# Altium PCB NMP_PCB.PcbDoc
Units mil, origin at the board's own origin, x right, y up, seen from the top; angles counter-clockwise.
Board outline 1600 x 920 mil, 2 copper layers (Top Layer, Bottom Layer); 9 components, 11 nets, 32 pads, 2 vias.
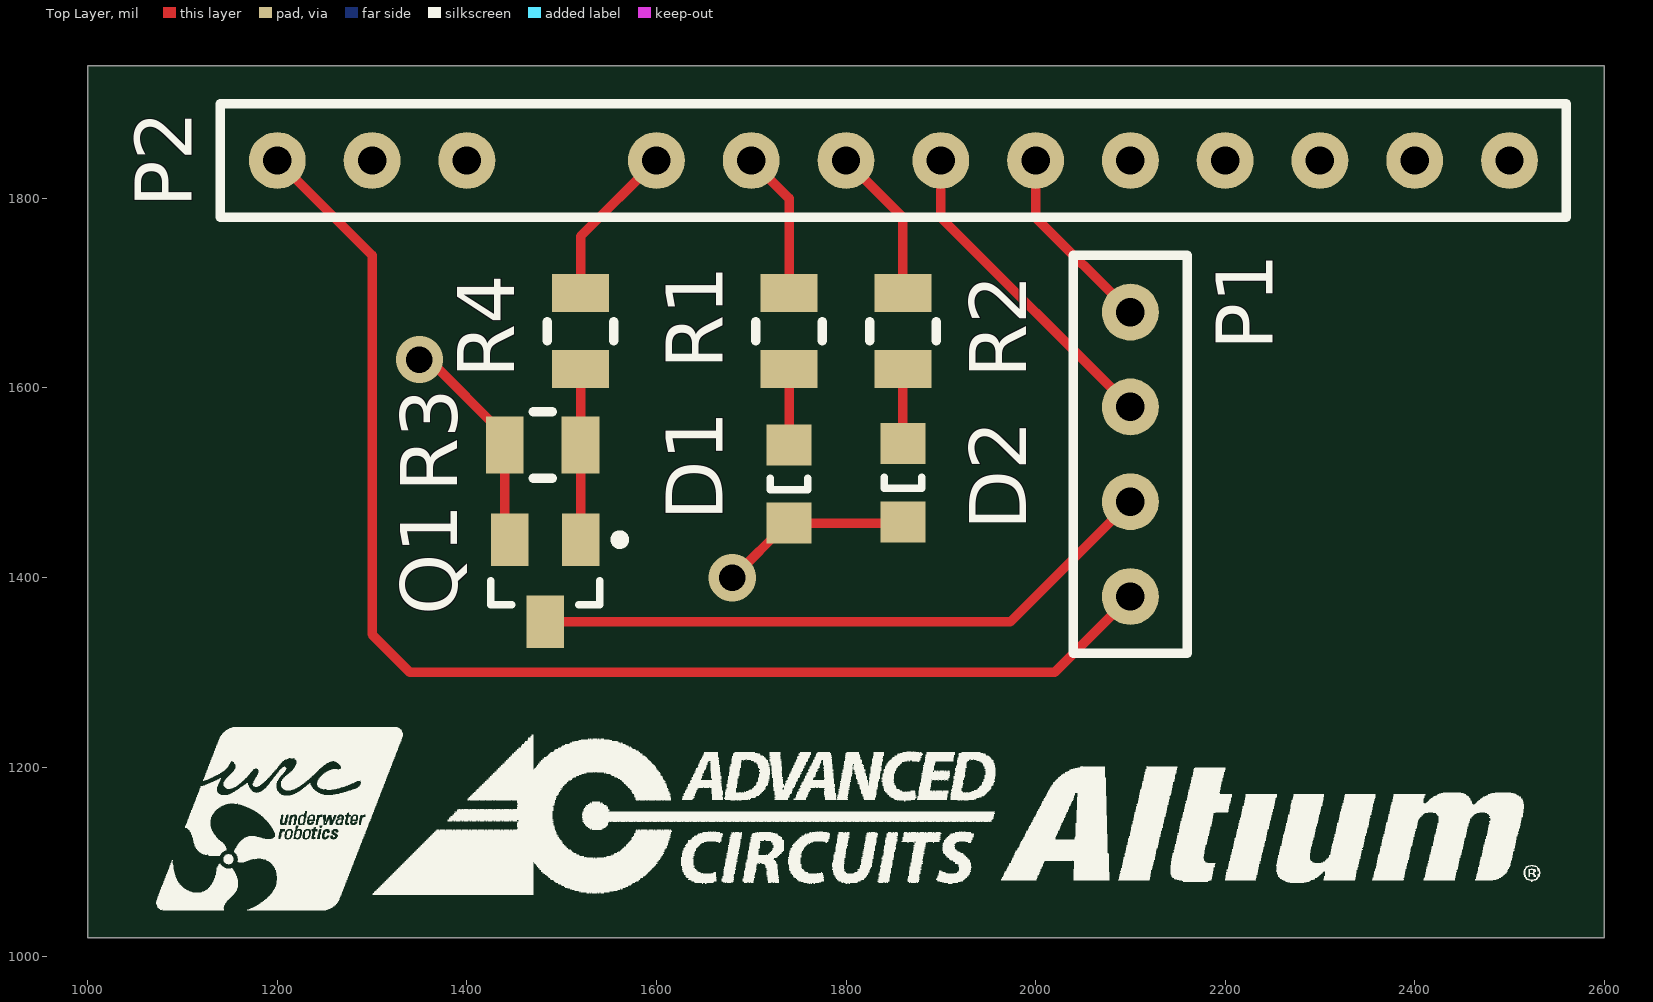
[diagram p0: Top Layer view]
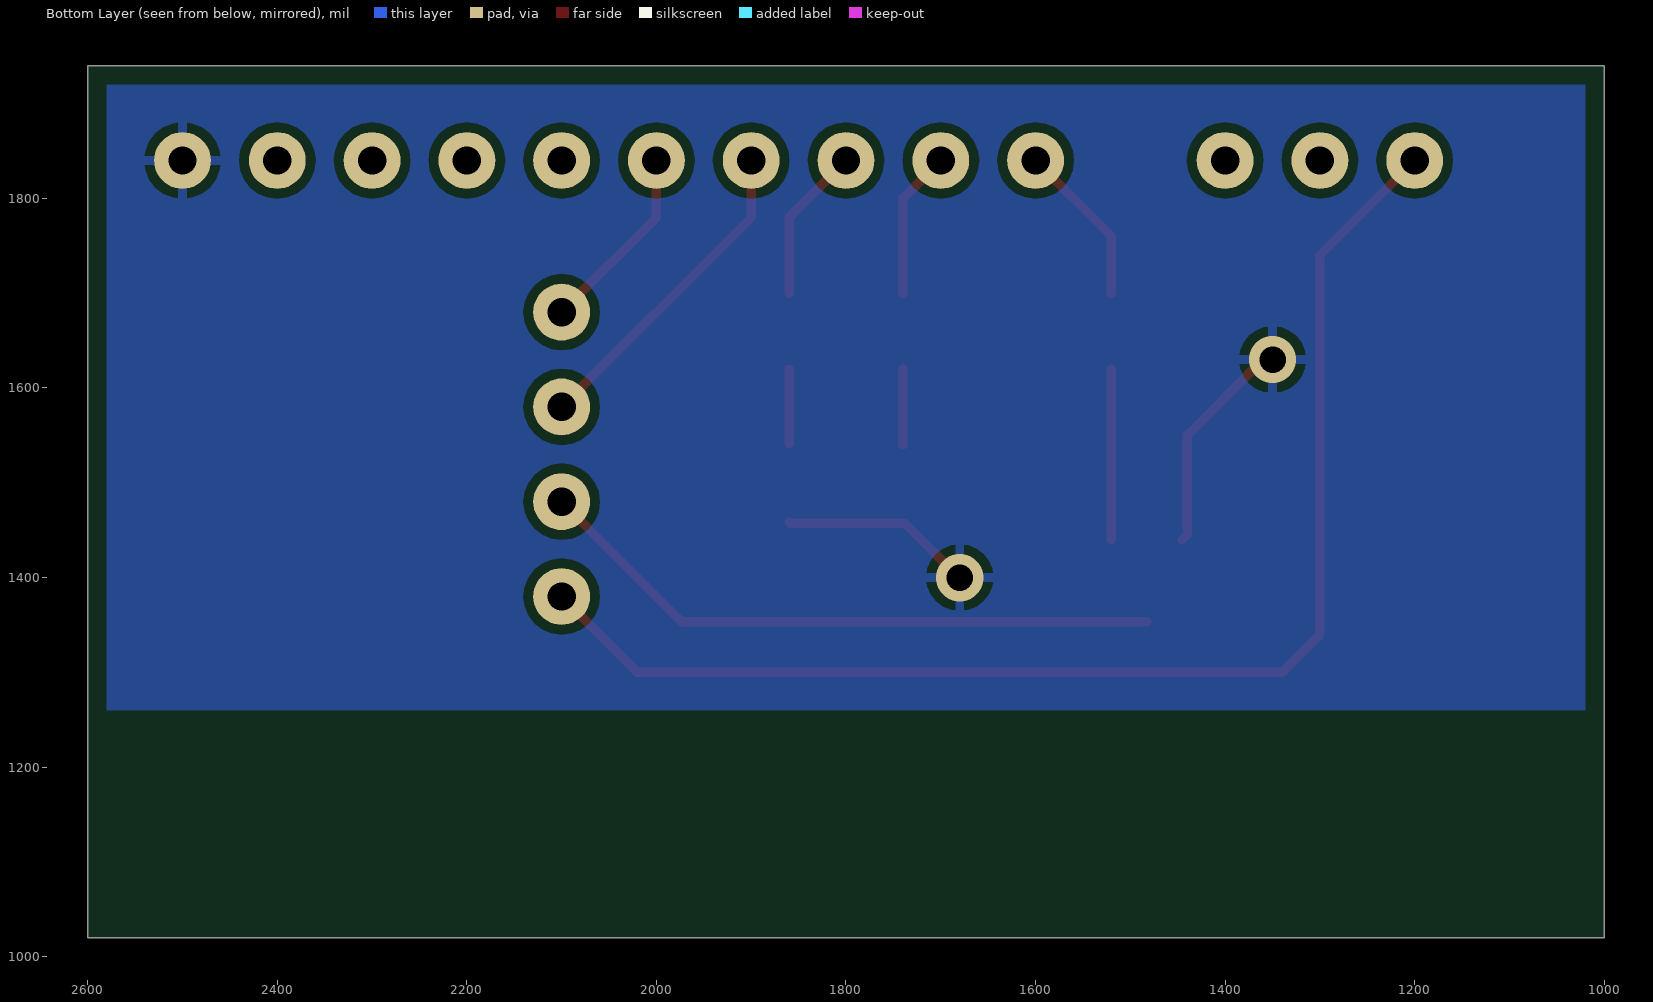
[diagram p1: Bottom Layer view, seen from below]

## Layer stack, top to bottom
Top Solder: solder mask 0.4, Solder Resist, Dk 3.5
Top Layer: signal copper 1.4
Dielectric 1: dielectric 12.6, FR-4, Dk 4.8
Bottom Layer: signal copper 1.4
Bottom Solder: solder mask 0.4, Solder Resist, Dk 3.5

## Board outline
1000,1020 2600,1020 2600,1940 1000,1940

## Design rules (kind name [scope] priority, off if disabled: settings)
Clearance [All] p1: gap=10 ignorepadtopadclearanceinfootprint=FALSE except(0: Arc-Hole Track-Hole SMDPad-Hole THPad-Hole Via-Hole Fill-Hole Poly-Hole Region-Hole Text-Hole)
PolygonConnect [All] p1: connectstyle=Relief reliefconductorwidth=10 reliefentries=4 polygonreliefangle="90 Angle" airgapwidth=10
RoutingVias [All] p1: holewidth=28 width=50 viastyle="Through Hole" minholewidth=28 minwidth=50 maxholewidth=28 maxwidth=50
SolderMaskExpansion [All] p1: expansion=4 istentingtop=FALSE
Width [All] p1: maxlimit=10 minlimit=10 preferedwidth=10
30 further rules are at their usual default settings.

## Components (designator, comment, footprint, x,y, rotation, side; value= is the part's Value field where it differs from the comment)
D1 "2V" 0805_A 1740,1498.66 r90 top
D2 "2V" 0805_A 1860,1500 r90 top
P1 "1x4 Header" "1X4 HEADER" 2300,1580 r90 top
P2 "To J2 & J4" "MSP-EXP430G2 Mating Headers for J2/J4" 2500,3640 r180 top value=N/A
Q1 "BSS123" FAIR-SOT23-3_V 1482.6,1396.69 r180 top value="1.7 V"
R1 "240" SMD-0805-RES 1740,1660 r0 top
R2 "240" SMD-0805-RES 1860,1660 r0 top
R3 "10k" SMD-0805-RES 1480,1540 r90 top
R4 "549" SMD-0805-RES 1520,1660 r0 top

## Footprints (in the part's own frame and the unit in brackets; to place one, negate y for a bottom-side part, rotate by r counter-clockwise, add the part's x,y. Pads: shape width x height; smd on the part's side, far side on the other; paste and mask are expansions set on the pad)
"1X4 HEADER" [mil]
  round 60 hole 30: 1(-200,200) 2(-100,200) 3(0,200) 4(100,200)
0805_A [mm] "Chip LED, 2-Leads, Body 2.0x1.3mm, IPC Medium Density"
  rect 1.1x1.2 smd: 1(-1.05,0) 2(1.05,0)
  silkscreen extent -0.15,-0.5 0.15,0.5, body extent -1,-0.62 1,0.63, height 0.68
FAIR-SOT23-3_V [mm] "SOT23, 3-Leads, Body 2.92x1.3mm, Pitch 0.95mm"
  rect 1x1.4 smd: 1(-0.95,-1.1) 2(0.95,-1.1) 3(0,1.1)
  silkscreen extent -2.13,-1.22 1.46,0.65, body extent -1.46,-0.65 1.46,0.65, height 1.2
"MSP-EXP430G2 Mating Headers for J2/J4" [mil] "Female Mating Headers for MSP-EXP430G2 J2 & J4"
  round 60 hole 30: 11(900,1800) 12(800,1800) 13(700,1800) 14(600,1800) 15(500,1800) 16(400,1800) 17(300,1800) 18(200,1800) 19(100,1800) 20(0,1800) 21(1100,1800) 22(1200,1800) 23(1300,1800)
SMD-0805-RES [mil]
  rect 60x40 smd: 1(0,40) 2(0,-40)
  silkscreen extent -35,-10 35,10, body extent -24,-39 26,39, height 31

## Part data
D1 D2: library part CMP-1426-00009-1, "SMD mono-color Chip LED, WL-SMCW, Bright Green, 150080VS75000", Color="Bright Green", Manufacturer="Wuerth Elektronik", Manufacturer Part Number=150080VS75000, ComponentLink1Description="Manufacturer URL", ComponentLink1URL=http://www.we-online.com, ComponentLink2Description=Datasheet, ComponentLink2URL=http://katalog.we-online.com/led/datasheet/150080VS75000.pdf, PackageReference=0805_A, PartNumber=150080VS75000
P1: library part "1X4 HEADER", "CONN HEADER VERT 4POS 2.54MM", Manufacturer="Würth Elektronik", Manufacturer Part Number=61300411121
P2: library part "MSP-EXP430G2 Mating Headers for J2/J4", "Female Mating Headers for MSP-EXP430G2 J2 & J4 / (can use Würth Elektronik 61301011121 and 61300311121)", Manufacturer=URC, Manufacturer Part Number=N/A
Q1: library part CMP-2000-04934-1, "N-Channel Logic Level Enhancement Mode Field Effect Transistor, 1.7 V, -55 to 150 degC, 3-Pin SOT-23, RoHS, Tape and Reel", Manufacturer=Fairchild, Maximum Continuous Drain Current=0.17A, Maximum Drain Source Voltage=100V, Maximum Gate Source Voltage=±20V, Operating Temperature=-55to150degC, Package=3SOT-23, Package Description="3-Pin Small Outline Transistor, Body 2.92 x 1.325 mm, Pitch 0.95 mm", Package Reference=SOT23-3, Package Version="Rev. 12, 03/2016", Category=MOSFET, Channel Mode=Enhancement, Channel Type=N, Datasheet URL=https://www.fairchildsemi.com/datasheets/BS/BSS123.pdf, Datasheet Version=Jun-03, Manufacturer Part Number=BSS123, Manufacturer URL=https://www.fairchildsemi.com/, Mounting=SurfaceMount, Package URL=http://www.fairchildsemi.com/dwg/MA/MA03D.pdf, Packaging=Tape&Reel, Rad Hard=No, RDS-on=6000@10VmOhm, Typical Fall Time=2.4ns, Typical Rise Time=9ns, Typical Turn-Off Delay Time=17ns, Typical Turn-On Delay Time=1.7ns
R1 R2: library part ERJ-6GEYJ241V, "RES SMD 240 OHM 5% 1/8W 0805", Digi-Key Part Number=P240ACT-ND, Manufacturer="Panasonic Electronic Components", Manufacturer Part Number=ERJ-6ENF2400V, Operating Temperature="-55°C ~ 155°C", Package / Case="0805 (2012 Metric)", Power (Watts)="0.125W, 1/8W", Supplier Device Package=0805, Temperature Coefficient=±200ppm/°C, Tolerance=±5%, @ qty=1500, Composition="Thick Film", Datasheets=http://industrial.panasonic.com/www-cgi/jvcr13pz.cgi?E+PZ+3+AOA0001+ERJ6GEYJ241V+7+WW, Factory Stock=0, Failure Rate=-, Features="Automotive AEC-Q200", Height - Seated (Max)="0.028\" (0.70mm)", Image=//media.digikey.com/Renders/Panasonic%20Renders/ERJ-0805%20Pkg.jpg, Minimum Quantity=1, Number of Terminations=2, Packaging="Cut Tape (CT)", Part Number=ERJ-6GEYJ241V, Part Status=Active, Quantity Available=1483, Series=ERJ, Size / Dimension="0.079\" L x 0.049\" W (2.00mm x 1.25mm)", Unit Price (USD)=0.00496
R3: library part ERJ-P06F1002V, "RES SMD 10K OHM 1% 1/2W 0805", Digi-Key Part Number=P16059CT-ND, Manufacturer="Panasonic Electronic Components", Operating Temperature="-55°C ~ 155°C", Package / Case="0805 (2012 Metric)", Power (Watts)="0.5W, 1/2W", Supplier Device Package=0805, Temperature Coefficient=±100ppm/°C, Tolerance=±1%, @ qty=1500, Composition="Thick Film", Datasheets=https://industrial.panasonic.com/cdbs/www-data/pdf/RDA0000/AOA0000C243.pdf, Factory Stock=0, Failure Rate=-, Features="Automotive AEC-Q200, Pulse Withstanding", Height - Seated (Max)="0.028\" (0.70mm)", Image=//media.digikey.com/Renders/Panasonic%20Renders/ERJ-0805%20Pkg.jpg, Manufacturer Part Number=ERJ-P06F1002V, Minimum Quantity=1, Number of Terminations=2, Packaging="Cut Tape (CT)", Part Number=ERJ-P06F1002V, Part Status=Active, Quantity Available=42054, Series=ERJ, Size / Dimension="0.079\" L x 0.049\" W (2.00mm x 1.25mm)", Unit Price (USD)=0.02534
R4: library part ERJ-6ENF5490V, "RES SMD 549 OHM 1% 1/8W 0805", Digi-Key Part Number=P549CCT-ND, Manufacturer="Panasonic Electronic Components", Operating Temperature="-55°C ~ 155°C", Package / Case="0805 (2012 Metric)", Power (Watts)="0.125W, 1/8W", Supplier Device Package=0805, Temperature Coefficient=±100ppm/°C, Tolerance=±1%, @ qty=1500, Composition="Thick Film", Datasheets=http://industrial.panasonic.com/www-cgi/jvcr13pz.cgi?E+PZ+3+AOA0002+ERJ6ENF5490V+7+WW, Factory Stock=0, Failure Rate=-, Features="Automotive AEC-Q200", Height - Seated (Max)="0.028\" (0.70mm)", Image=//media.digikey.com/Renders/Panasonic%20Renders/ERJ-0805%20Pkg.jpg, Manufacturer Part Number=ERJ-6ENF5490V, Minimum Quantity=1, Number of Terminations=2, Packaging="Cut Tape (CT)", Part Number=ERJ-6ENF5490V, Part Status=Active, Quantity Available=49191, Series=ERJ, Size / Dimension="0.079\" L x 0.049\" W (2.00mm x 1.25mm)", Unit Price (USD)=0.00729

## Via types
v1: diameter 50, hole 28, Top Layer to Bottom Layer, 2 vias

## Nets (pads, with @x,y where several pads share a name; then routed paths per layer and width w, separated by ;. In a path a pad name is that pad's centre, name@x,y a point inside that pad or via, vN(x,y) a via of type N, cw(c..) or ccw(c..) an arc to the next point about the centre after c; other vN are vias at no path point)
GND: D1.1 D2.1 P2.20 Q1.2 R3.1 | length 439.6
  Top Layer w10: v1(1350,1630) 1360,1630 1440,1550 R3.1 1440,1445.2 Q1.2 ; v1(1680,1400) 1680.71,1400 1738.03,1457.32 D1.1 1858.66,1457.32 D2.1
LED_SENSE1: P2.13 R2.1 | length 164.9
  Top Layer w10: P2.13 1860,1780 R2.1
LED_SENSE2: D2.2 R2.2 | length 78.7
  Top Layer w10: D2.2 R2.2
LED_VCC1: P2.12 R1.1 | length 156.6
  Top Layer w10: P2.12 1740,1800 R1.1
LED_VCC2: D1.2 R1.2 | length 80
  Top Layer w10: D1.2 R1.2
NFET_DRAIN: P1.2 Q1.3 | length 669.8
  Top Layer w10: Q1.3 1973.39,1353.39 P1.2
NFET_GATE1: P2.11 R4.1 | length 173.1
  Top Layer w10: R4.1 1520,1760 P2.11
NFET_GATE2: Q1.1 R3.2 R4.2 | length 180
  Top Layer w10: Q1.1 R3.2 R4.2
SCL: P1.3 P2.14 | length 342.8
  Top Layer w10: P2.14 1900,1780 P1.3
SDA: P1.4 P2.15 | length 201.4
  Top Layer w10: P2.15 2000,1780 P1.4
VCC: P1.1 P2.23 | length 1391.1
  Top Layer w10: P2.23 1300,1740 1300,1340 1340,1300 2020,1300 P1.1
pads on no net: P2.16 P2.17 P2.18 P2.19 P2.21 P2.22

## Polygon pours and split planes (outlines as drawn)
GND on Bottom Layer "GND_L02_P000" (solid, pour order 0): 1020,1920 2580,1920 2580,1260 1020,1260

## Silkscreen, mask and mechanical layers (free items; w line width, h text height)
Top Overlay:
  drawing of 47 lines, arcs and shapes, not listed